# Altium PCB DB.PcbDoc (part 2 of 2)
Units mil, origin at the board's own origin, x right, y up, seen from the top; angles counter-clockwise.
Board outline 2968 x 1917 mil, 2 copper layers (Top Layer, Bottom Layer); 91 components, 77 nets, 333 pads, 79 vias.
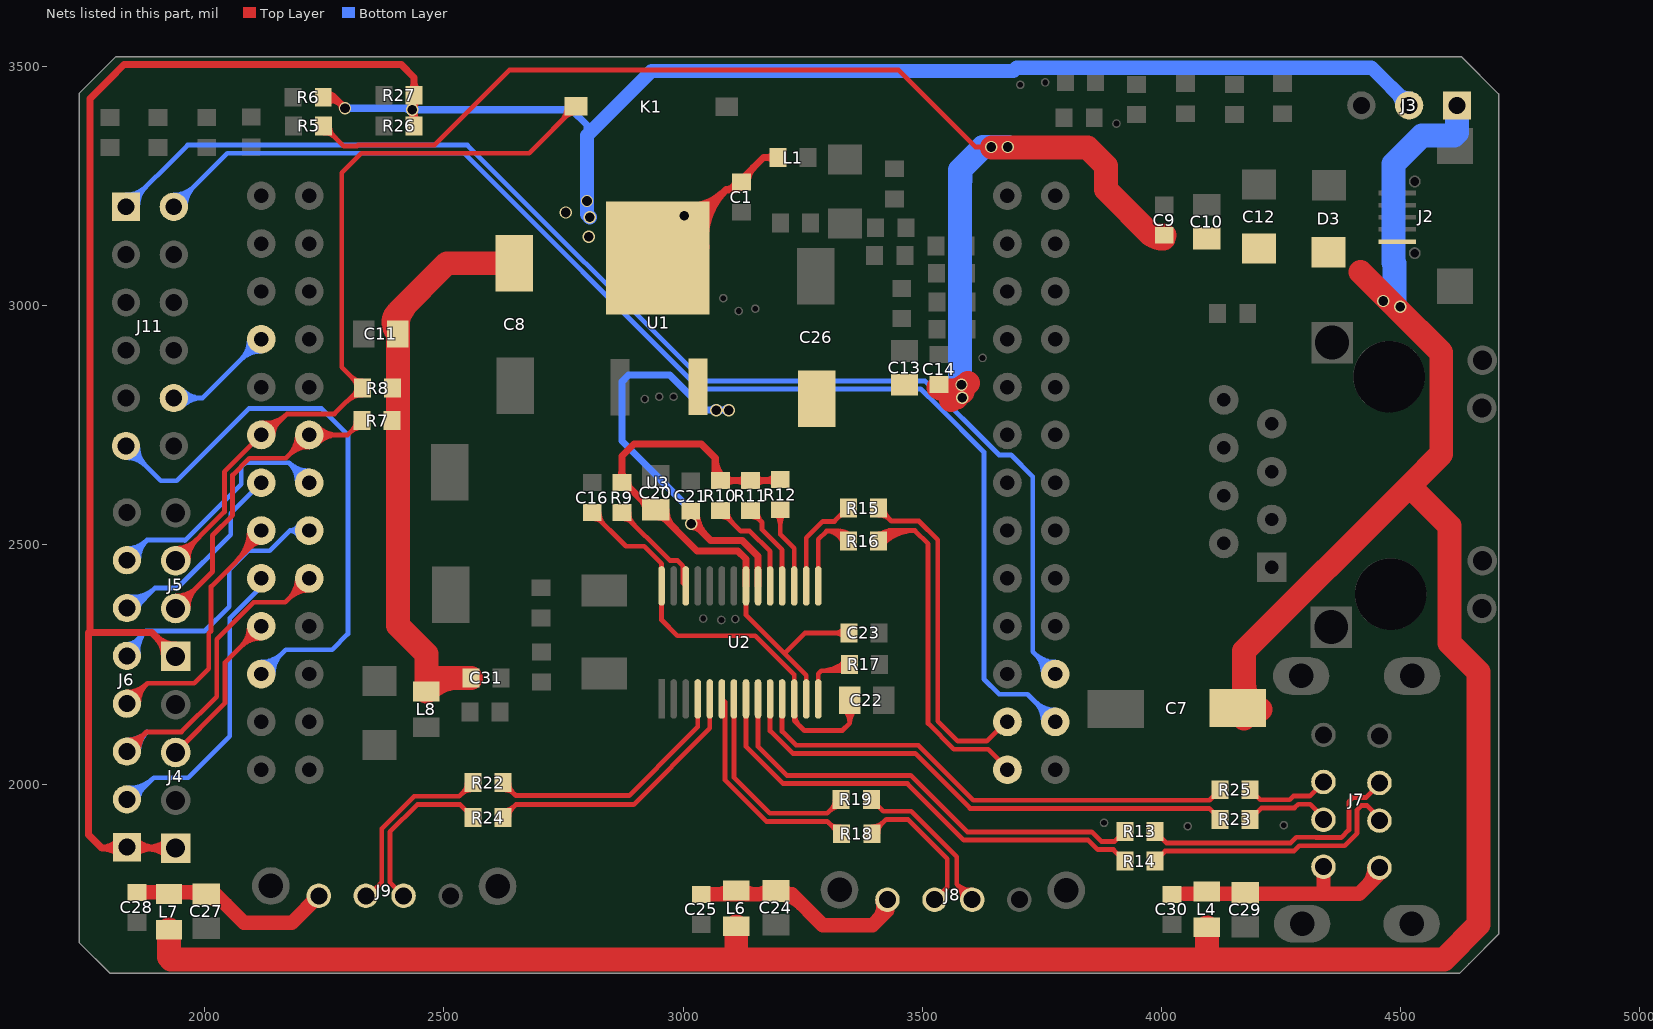
[diagram p2: the nets of this part, all layers, seen from the top]

## Via types
v1: diameter 26, hole 20, Top Layer to Bottom Layer, tented both sides, 72 vias
v2: diameter 50, hole 40, Top Layer to Bottom Layer, 4 vias
v3: diameter 157.48, hole 157.48, Top Layer to Bottom Layer, 3 vias

## Nets (pads, with @x,y where several pads share a name; then routed paths per layer and width w, separated by ;. In a path a pad name is that pad's centre, name@x,y a point inside that pad or via, vN(x,y) a via of type N, cw(c..) or ccw(c..) an arc to the next point about the centre after c; other vN are vias at no path point) (continued)
NetJ4_3: J4.3 U3.49 | length 489.8
  Top Layer w10: J4.3@1939,2066 2042,2169 2042,2254 U3.49@2118,2330 ; U3.49@2093,2330 cw(c2032.64,2330) 2075.32,2287.32 cw(c2118,2244.64) U3.49@2118,2305 ; U3.49@2103,2330 cw(c2066.79,2330) 2092.39,2304.39 cw(c2118,2278.79) U3.49@2118,2315
NetJ5_2: J5.2 R7.1 U3.32 | length 1156.9
  Top Layer w10: J5.2@1939,2367 2016,2444 2016,2519.96 2058,2561.96 2058,2645.96 2093.04,2681 2169,2681 U3.32@2218,2730 2298.5,2730 R7.1@2328.5,2760 ; J5.2@1939,2383 ccw(c1939,2421.63) 1966.31,2394.31 ccw(c1993.63,2367) J5.2@1955,2367 ; J5.2@1939,2393 ccw(c1939,2455.77) 1983.38,2411.38 ccw(c2027.77,2367) J5.2@1965,2367 ; U3.32@2193,2730 cw(c2132.64,2730) 2175.32,2687.32 cw(c2218,2644.64) U3.32@2218,2705 ; U3.32@2203,2730 cw(c2166.79,2730) 2192.39,2704.39 cw(c2218,2678.79) U3.32@2218,2715 ; U3.32@2228.61,2719.39 cw(c2254.21,2693.79) 2254.21,2730 cw(c2254.21,2766.21) U3.32@2228.61,2740.61 ; U3.32@2235.68,2712.32 cw(c2278.36,2669.64) 2278.36,2730 cw(c2278.36,2790.36) U3.32@2235.68,2747.68 ; 2303.44,2734.93 cw(c2328.5,2709.86) R7.1@2328.5,2745.31 ; 2308.19,2739.68 ccw(c2289.84,2758.03) R7.1@2315.79,2758.03
NetJ5_3: J5.3 K1.2 R8.2 U3.45 | length 2060.5
  Top Layer w10: J5.3@1939,2467 2041,2569 2041,2653 U3.45@2118,2730 2128,2730 2172,2774 ; J5.3@1939,2483 ccw(c1939,2521.63) 1966.31,2494.31 ccw(c1993.63,2467) J5.3@1955,2467 ; J5.3@1939,2493 ccw(c1939,2555.77) 1983.38,2511.38 ccw(c2027.77,2467) J5.3@1965,2467 ; U3.45@2119.22,2744.95 ccw(c2123.09,2792.35) 2156.72,2758.72 ; U3.45@2120.04,2754.92 ccw(c2125.4,2820.59) 2172,2774 ; U3.45@2143,2730 cw(c2179.21,2730) 2153.61,2755.61 ; 2296.75,2799.75 cw(c2329.5,2766.99) R8.2@2329.5,2813.31 ; 2304.44,2853.07 ccw(c2329.5,2878.14) R8.2@2329.5,2842.69 ; 2309.19,2848.32 cw(c2290.84,2829.97) R8.2@2316.79,2829.97 ; R8.2@2312.37,2815.37 ccw(c2301.71,2826.03) R8.2@2316.79,2826.03 ; R8.2@2313.82,2816.82 cw(c2329.5,2801.13) R8.2@2329.5,2823.32 ; 2744.21,3385.21 ccw(c2712.42,3417) K1.2@2757.38,3417 ; 2753.71,3394.72 cw(c2772.06,3376.37) K1.2@2772.06,3402.32 ; K1.2@2776,3417 2678,3319 2327,3319 2286,3278 2286,2871.5 R8.2@2329.5,2828 2325,2828 2271,2774 2172,2774
NetJ6_2: J6.2 U3.48 | length 756.1
  Bottom Layer w10: J6.2@1837,1968 1848,1968 1893,2013 ; J6.2@1837.93,1982.5 ccw(c1841.21,2033.52) 1877.37,1997.37 ; J6.2@1838.57,1992.48 ccw(c1843.1,2062.89) 1893,2013 ; J6.2@1861.53,1968 cw(c1894.19,1968) 1871.09,1991.09 ; U3.48@2118,2430 2118,2413 2052,2347 2052,2100 1965,2013 1893,2013
NetJ6_3: J6.3 U3.35 | length 1099.2
  Top Layer w10: J6.3@1837,2068 1878,2109 ; J6.3@1837.22,2082.53 ccw(c1837.72,2115.85) 1861.28,2092.28 ccw(c1884.85,2068.72) J6.3@1851.53,2068.22 ; J6.3@1837.37,2092.52 ccw(c1838.21,2148.78) 1878,2109 ; J6.3@1861.52,2068.37 cw(c1917.78,2069.21) 1878,2109 ; U3.35@2193,2430 cw(c2132.64,2430) 2175.32,2387.32 cw(c2218,2344.64) U3.35@2218,2405 ; U3.35@2203,2430 cw(c2166.79,2430) 2192.39,2404.39 cw(c2218,2378.79) U3.35@2218,2415 ; U3.35@2218,2430 2168,2380 2102,2380 2025,2303 2025,2183 1951,2109 1878,2109
  Bottom Layer w10: J6.3@1837,2068 1838,2068 1879,2109 cw(c1839.16,2148.83) J6.3@1837.66,2092.52 ; J6.3@1837.39,2082.52 ccw(c1838.31,2116.8) 1862.55,2092.55 ; J6.3@1851.53,2068 cw(c1884.19,2068) 1861.09,2091.09 ; J6.3@1861.53,2068 cw(c1918.33,2068) 1878.16,2108.16
NetJ6_4: J6.4 U3.47 | length 862.1
  Top Layer w10: J6.4@1837,2168 1880,2211 1978,2211 2008,2241 2008,2315.04 2013,2320.04 2013,2413 2118,2518 U3.47@2118,2530 ; J6.4@1837,2182.53 ccw(c1837,2217.6) 1861.8,2192.8 ccw(c1886.6,2168) J6.4@1851.53,2168 ; J6.4@1837,2192.53 ccw(c1837,2251.74) 1878.87,2209.87 ccw(c1920.74,2168) J6.4@1861.53,2168 ; 2066.84,2466.84 ccw(c2003.67,2530) U3.47@2093,2530 ; 2083.91,2483.91 ccw(c2037.82,2530) U3.47@2103,2530 ; 2095.81,2495.81 cw(c2118,2473.62) U3.47@2118,2505 ; 2100.98,2500.98 ccw(c2071.96,2530) U3.47@2113,2530
NetJ6_5: J6.5 U3.34 | length 702.4
  Bottom Layer w10: J6.5@1837,2268 1837,2280 1877,2320 ; J6.5@1837,2292.53 ccw(c1837,2322.77) 1858.39,2301.39 ; J6.5@1851.36,2270.23 cw(c1892.52,2276.61) 1863.06,2306.06 ; J6.5@1861.24,2271.76 cw(c1916.64,2280.35) 1877,2320 ; U3.34@2195.68,2518.75 ccw(c2177.4,2509.53) 2177.4,2530 ; U3.34@2195.68,2541.25 cw(c2177.4,2550.47) 2177.4,2530 ; U3.34@2218,2530 2177.4,2530 ; 1877,2320 2000,2320 2051,2371 2051,2448 2091,2488 2135.4,2488 2177.4,2530
NetJ6_6: J6.6 U3.46 | length 570.3
  Bottom Layer w10: J6.6@1837,2368 1854,2368 1896,2410 ; J6.6@1837.72,2372.47 ccw(c1843.38,2407.35) 1868.36,2382.36 ; J6.6@1839.32,2382.34 ccw(c1847.23,2431.13) 1882.18,2396.18 ; J6.6@1840.92,2392.21 ccw(c1851.08,2454.91) 1896,2410 ; J6.6@1861.53,2368 cw(c1879.7,2368) 1866.85,2380.85 ; U3.46@2118,2630 2054,2566 2054,2521.19 1942.81,2410 1896,2410
NetJ6_7: J6.7 U3.33 | length 801
  Bottom Layer w10: J6.7@1837,2468 1879,2510 1956.81,2510 1957.91,2508.91 2076,2627 2076,2663 2085,2672 2176,2672 ; J6.7@1837,2482.53 ccw(c1837,2517.6) 1861.8,2492.8 ccw(c1886.6,2468) J6.7@1851.53,2468 ; J6.7@1837,2492.53 ccw(c1837,2551.74) 1878.87,2509.87 ccw(c1920.74,2468) J6.7@1861.53,2468 ; U3.33@2193,2630.29 ccw(c2134.95,2630.95) 2176,2672 ; U3.33@2203,2630.17 ccw(c2168.17,2630.57) 2192.8,2655.2 ccw(c2217.43,2679.83) U3.33@2217.83,2645 ; U3.33@2217.71,2655 cw(c2217.05,2713.05) 2176,2672 ; U3.33@2218,2630 2176,2672
NetJ7_2: J7.2 R25.2 | length 177.8
  Top Layer w10: R25.2@4185.5,1988 4206.5,1967 4268,1967 4276,1975 4310,1975 4338.79,2003.79 J7.2@4338.79,2004.37
NetJ7_3: J7.3 R23.2 | length 182.6
  Top Layer w10: R23.2@4185.5,1926 4209.5,1950 4278,1950 4286,1958 4311,1958 4338.79,1930.21 J7.3@4338.79,1925.63
NetJ7_6: J7.6 R14.2 | length 562.3
  Top Layer w10: R14.2@3986.5,1839 4007.5,1860 4277.04,1860 4288.08,1871.04 4383.08,1871.04 4409,1896.96 4409,1946 4418,1955 4430,1955 4455.79,1929.21 J7.6@4455.79,1923.63
NetJ7_7: J7.7 R13.2 | length 574.8
  Top Layer w10: R13.2@3986.5,1901 4010.5,1877 4270,1877 4282,1889 4322.26,1889 4323.22,1888.04 4376.04,1888.04 4392,1904 4392,1963 4401,1972 4428,1972 4455.79,1999.79 J7.7@4455.79,2002.37 J7.7@4462.59,2002.37
NetJ8_2: J8.2 R18.2 | length 348.8
  Top Layer w10: R18.2@3394.5,1896 3424.5,1926 3470,1926 3552,1844 3552,1784.58 J8.2@3525.63,1758.21 ; R18.2@3394.5,1910.68 ccw(c3394.5,1946.14) 3419.56,1921.07 ; R18.2@3407.21,1897.97 cw(c3433.16,1897.97) 3414.81,1916.32
NetJ8_3: J8.3 R19.2 | length 400.1
  Top Layer w10: R19.2@3393.5,1968 3418.5,1943 3477.04,1943 3572,1848.04 3572,1790.58 ; J8.3@3583.82,1759.45 ccw(c3543.3,1761.88) 3572,1790.58 ; J8.3@3603.14,1778.77 cw(c3600.7,1819.28) 3572,1790.58 ; J8.3@3604.37,1758.21 3572,1790.58
NetJ9_2: J9.2 R22.2 | length 435.8
  Top Layer w10: J9.2@2336.63,1766.21 2341.21,1766.21 2370,1795 2370,1907.04 2437.45,1974.5 2532,1974.5 R22.2@2560.5,2003 ; 2535.44,1977.93 cw(c2560.5,1952.86) R22.2@2560.5,1988.32 ; 2540.19,1982.68 ccw(c2521.84,2001.03) R22.2@2547.79,2001.03
NetJ9_3: J9.3 R24.2 | length 353.8
  Top Layer w10: J9.3@2415.37,1766.21 2387,1794.58 2387,1900 2444,1957 2533.5,1957 R24.2@2560.5,1930
NetR9_1: R9.1 U2.26 | length 266.2
  Top Layer w10: R9.1@2872,2567.5 2971.95,2467.56 2988.02,2467.56 2999.09,2456.49 2999.09,2420.53 U2.26@3005.39,2414.22 ; R9.1@2873.97,2554.79 cw(c2873.97,2528.84) 2892.32,2547.19 ; R9.1@2886.69,2567.5 ccw(c2922.14,2567.5) 2897.07,2542.44
NetR10_1: R10.1 U2.19 | length 259.6
  Top Layer w10: R10.1@3078,2571.5 3120.5,2529 3139.43,2529 3181.77,2486.66 U2.19@3181.77,2414.22 ; R10.1@3079.97,2558.79 cw(c3079.97,2532.84) 3098.32,2551.19 ; R10.1@3092.69,2571.5 ccw(c3128.14,2571.5) 3103.07,2546.44
NetR11_1: R11.1 U2.18 | length 229.4
  Top Layer w10: R11.1@3141,2571.5 3165,2547.5 3165,2531.72 3206.97,2489.75 U2.18@3206.97,2414.22 ; R11.1@3142.97,2558.79 cw(c3142.97,2532.84) 3161.32,2551.19 ; R11.1@3155.66,2570.68 ccw(c3184.34,2568.81) 3164.01,2548.49
NetR12_1: R12.1 U2.17 | length 219.6
  Top Layer w10: R12.1@3194.01,2564.51 cw(c3172.3,2542.8) 3203,2542.8 cw(c3233.7,2542.8) R12.1@3211.99,2564.51 ; R12.1@3203,2573.5 3203,2522 3232.17,2492.83 U2.17@3232.17,2414.22
NetR15_1: R15.1 U2.16 | length 200.1
  Top Layer w10: U2.16@3257.36,2414.22 3257.36,2514.65 3291.72,2549 3316.23,2549 R15.1@3335.04,2567.81
NetR15_2: R15.2 U3.25 | length 759.9
  Top Layer w10: R15.2@3408.5,2562.31 cw(c3408.5,2526.86) 3433.56,2551.93 ; R15.2@3408.5,2577 3435.5,2550 3493,2550 3532.22,2510.78 3532.22,2360 3532.22,2131.78 3574,2090 3635,2090 3677,2132 U3.25@3677,2134 ; R15.2@3421.21,2575.03 ccw(c3447.16,2575.03) 3428.81,2556.68
NetR16_1: R16.1 U2.15 | length 326.8
  Top Layer w10: U2.15@3282.56,2414.22 3282.56,2511.56 3300,2529 ; 3314.33,2529 cw(c3314.33,2498.51) R16.1@3342.95,2509.03 ; 3328.67,2529 cw(c3328.67,2503.78) R16.1@3352.34,2512.48 ; R16.1@3332.79,2510.11 ccw(c3307.86,2510.39) 3325.49,2528.01 ccw(c3339.64,2542.16) R16.1@3343.22,2522.48 ; R16.1@3333.57,2505.58 ccw(c3300,2493.24) 3300,2529 ; R16.1@3345.5,2508 3324.5,2529 3300,2529
NetR16_2: R16.2 U3.26 | length 917.4
  Top Layer w10: R16.2@3403.21,2514.98 cw(c3438.16,2481.82) 3438.16,2530 ; R16.2@3408.5,2508 3430.5,2530 ; R16.2@3409.78,2522.62 ccw(c3412.36,2548.13) 3430.5,2530 ; R16.2@3410.47,2508.1 cw(c3461.44,2459.74) 3461.44,2530 ; R16.2@3417.72,2501.22 cw(c3484.71,2437.65) 3484.71,2530 ; R16.2@3421.21,2509.97 cw(c3447.16,2509.97) 3428.81,2528.32 ; U3.26@3677,2034 3638,2073 3566,2073 3512.22,2126.78 3512.22,2502.5 3484.72,2530 ; 3430.5,2530 3484.72,2530
NetR17_2: R17.2 U2.14 | length 189.1
  Top Layer w10: U2.14@3282.56,2178 3282.56,2230.56 3289,2237 3328,2237 ; 3290.17,2237 ccw(c3290.17,2305.36) R17.2@3338.51,2257.02 ; 3314.31,2237 ccw(c3314.31,2281.22) R17.2@3345.58,2249.95
PA_PE_G0: J11.2 U3.12 | length 2959.6
  Bottom Layer w10: J11.2@1935,3207 2047,3319 2541.96,3319 3034.96,2826 3497,2826 3532,2791 3629,2694 3629,2219.6 3660.6,2188 3720,2188 U3.12@3778,2130 ; J11.2@1935,3221.53 ccw(c1935,3256.6) 1959.8,3231.8 ccw(c1984.6,3207) J11.2@1949.53,3207 ; J11.2@1935,3231.53 ccw(c1935,3290.74) 1976.87,3248.87 ccw(c2018.74,3207) J11.2@1959.53,3207 ; U3.12@3753,2130 ccw(c3692.64,2130) 3735.32,2172.68 ccw(c3778,2215.36) U3.12@3778,2155 ; U3.12@3763,2130 ccw(c3726.79,2130) 3752.39,2155.61 ccw(c3778,2181.21) U3.12@3778,2145
PA_PE_G1: J11.1 U3.11 | length 2968.7
  Bottom Layer w10: J11.1@1835,3207 1964,3336 2549,3336 3042,2843 3505.6,2843 3660.6,2688 3686,2688 3731,2643 3731,2277 U3.11@3778,2230 ; J11.1@1835,3221.53 ccw(c1835,3256.6) 1859.8,3231.8 ccw(c1884.6,3207) J11.1@1849.53,3207 ; J11.1@1835,3231.53 ccw(c1835,3290.74) 1876.87,3248.87 ccw(c1918.74,3207) J11.1@1859.53,3207 ; U3.11@3753,2230 ccw(c3692.64,2230) 3735.32,2272.68 ccw(c3778,2315.36) U3.11@3778,2255 ; U3.11@3763,2230 ccw(c3726.79,2230) 3752.39,2255.61 ccw(c3778,2281.21) U3.11@3778,2245
USB_SLAVE1_D+: R25.1 U2.11 | length 1052.3
  Top Layer w10: U2.11@3206.97,2178 3206.97,2110.03 3236,2081 3492,2081 3607,1966 4100.5,1966 R25.1@4122.5,1988
USB_SLAVE1_D-: R23.1 U2.10 | length 1084.3
  Top Layer w10: U2.10@3181.77,2178 3181.77,2111.19 3228.96,2064 3484.96,2064 3599.96,1949 4099.5,1949 R23.1@4122.5,1926
USB_SLAVE2_D+: R13.1 U2.9 | length 957.4
  Top Layer w10: U2.9@3156.58,2178 3156.58,2078.42 3217,2018 3476,2018 3594,1900 3854.04,1900 3874.04,1880 3902.5,1880 R13.1@3923.5,1901
USB_SLAVE2_D-: R14.1 U2.8 | length 990.8
  Top Layer w10: U2.8@3131.38,2178 3131.38,2078.62 3209,2001 3468.96,2001 3586.96,1883 3839,1883 3847,1883 3867,1863 3899.5,1863 R14.1@3923.5,1839
USB_SLAVE3_D+: R19.1 U2.7 | length 479.7
  Top Layer w10: U2.7@3106.18,2178 3106.18,2013.82 3181,1939 3301.5,1939 R19.1@3330.5,1968 ; 3305.44,1942.93 cw(c3330.5,1917.86) R19.1@3330.5,1953.32 ; 3310.19,1947.68 ccw(c3291.84,1966.03) R19.1@3317.79,1966.03
USB_SLAVE3_D-: R18.1 U2.6 | length 501
  Top Layer w10: U2.6@3080.98,2178 3087.29,2171.69 3087.29,2008.67 3173.96,1922 3301,1922 3324,1899 R18.1@3331.5,1899 ; 3304.24,1918.76 ccw(c3324.97,1939.5) R18.1@3329.53,1910.53 ; R18.1@3314.37,1908.63 cw(c3303.71,1897.97) R18.1@3318.79,1897.97
USB_SLAVE4_D+: R24.1 U2.5 | length 619.3
  Top Layer w10: R24.1@2623.5,1930 2650.5,1957 2896.28,1957 3055.79,2116.5 U2.5@3055.79,2178 ; R24.1@2623.5,1944.68 ccw(c2623.5,1980.14) 2648.56,1955.07 ; R24.1@2636.21,1931.97 cw(c2662.16,1931.97) 2643.81,1950.32
USB_SLAVE4_D-: R22.1 U2.4 | length 600.6
  Top Layer w10: R22.1@2623.5,1988.32 cw(c2623.5,1952.86) 2648.56,1977.93 ; R22.1@2623.5,2003 2650.5,1976 2887,1976 3005.49,2094.49 ; R22.1@2636.21,2001.03 ccw(c2662.16,2001.03) 2643.81,1982.68 ; 2994,2083 3005.49,2094.49 ; U2.4@3030.59,2178 3030.59,2119.59 3005.49,2094.49
USB_VCC1: C29.2 C30.2 J7.4 J7.5 L4.2 | length 624.1
  Top Layer w30: 4048,1770.5 4175,1770.5 4413.5,1770.5 4455.79,1812.79 J7.5@4455.79,1825.2 ; 4062.58,1770.5 ccw(c4062.58,1800.93) L4.2@4084.1,1779.41 ; L4.2@4105.9,1779.41 ccw(c4127.42,1800.93) 4127.42,1770.5 ; 4145.98,1770.5 ccw(c4145.98,1795.55) C29.2@4163.69,1777.83 ; C29.2@4186.31,1777.83 ccw(c4204.02,1795.55) 4204.02,1770.5 ; 4337,1772.37 4338.79,1774.16 J7.4@4338.79,1827.2 ; 4428.93,1785.93 ccw(c4389.65,1825.2) J7.5@4445.2,1825.2
USB_VCC2: 
USB_VCC3: C24.2 C25.2 J8.1 L6.2 | length 708.1
  Top Layer w30: C25.2@3038,1769.5 3227.5,1769.5 ; 3071.34,1769.5 ccw(c3071.34,1810.17) L6.2@3100.1,1781.41 ; L6.2@3121.9,1781.41 ccw(c3150.66,1810.17) 3150.66,1769.5 ; 3152.91,1769.5 ccw(c3152.91,1811.62) C24.2@3182.69,1781.83 ; C24.2@3199.91,1768.8 cw(c3199.91,1700.47) 3248.22,1748.78 ; C24.2@3201.8,1769.03 cw(c3211.16,1732.49) 3237.83,1759.17 ; C24.2@3206.21,1780.74 ccw(c3227.5,1795.27) 3227.5,1769.5 ; 3407,1716 ccw(c3378.92,1744.09) J8.1@3417.04,1755.24 ; J8.1@3427.2,1758.21 3427.2,1736.2 3396,1705 3292,1705 3227.5,1769.5
USB_VCC4: C27.2 C28.2 J9.1 L7.2 | length 533.6
  Top Layer w30: C28.2@1858,1773.5 2003,1773.5 2018.5,1773.5 2082,1710 2181.99,1710 J9.1@2238.2,1766.21 ; 1896.95,1773.5 cw(c1896.95,1749.24) L7.2@1914.1,1766.39 ; L7.2@1935.9,1766.39 cw(c1953.05,1749.24) 1953.05,1773.5 ; 1968.85,1773.5 cw(c1968.85,1741.18) C27.2@1991.69,1764.03 ; C27.2@2008.91,1761.8 cw(c2008.91,1710.37) 2045.27,1746.73
VCC3V3: C1.1 C8.1 C11.2 C31.1 J3.2 J4.1 J5.1 J6.1 L1.1 L8.1 R6.1 R7.2 R8.1 R26.1 R27.1 U1.3 | length 8708.9
  Top Layer w15: 1757,2317 1757,1894 1785,1866 ; 1788.65,1866 cw(c1788.65,1819.65) J6.1@1821.42,1852.42 ; 1806,3479 1800,3473 ; J6.1@1820.22,1882.28 cw(c1785,1912.25) 1785,1866 ; J6.1@1852.58,1852.42 cw(c1885.35,1819.65) 1885.35,1866 ; J6.1@1852.58,1883.58 ccw(c1895.01,1926.01) 1895.01,1866 ; J5.1@1915.5,2267 ccw(c1858.77,2267) 1898.88,2307.12 ccw(c1939,2347.23) J5.1@1939,2290.5 ; J4.1@1922.38,1849.38 ccw(c1882.27,1809.27) 1882.27,1866 ccw(c1882.27,1922.73) J4.1@1922.38,1882.62 ; J4.1@1939,1866 1785,1866 ; J5.1@1939,2267 1889,2317 1760,2317 1760,3433 1800,3473 ; R6.1@2244.64,3437.87 cw(c2256.24,3422.3) 2269.97,3436.03 ; R6.1@2247.39,3438.81 cw(c2248.42,3393.55) 2280.43,3425.57 ; R6.1@2247.5,3436 2270,3436 ; R6.1@2253.6,3425.84 cw(c2266.72,3408.25) 2282.24,3423.76 ; R6.1@2255.19,3429.28 cw(c2270,3416.33) 2270,3436 ; R6.1@2255.19,3442.72 ccw(c2270,3455.67) 2270,3436 ; v1@2287.5,3413 ccw(c2274.22,3413) 2283.61,3422.39 ccw(c2293,3431.78) v1@2293,3418.5 ; v1(2293,3413) 2270,3436 ; v1@2430.11,3406.11 cw(c2412.28,3388.28) R26.1@2437.5,3388.28 ; v1@2430.11,3413.89 ccw(c2412.28,3431.72) R27.1@2437.5,3431.72 ; R26.1@2430.27,3385.19 ccw(c2412.83,3402.63) 2437.5,3402.63 ccw(c2462.16,3402.63) R26.1@2444.72,3385.19 ; R27.1@2430.27,3430.81 cw(c2412.83,3413.37) 2437.5,3413.37 cw(c2462.16,3413.37) R27.1@2444.72,3430.81 ; R27.1@2430.27,3449.19 ccw(c2412.83,3466.63) 2437.5,3466.63 ccw(c2462.16,3466.63) R27.1@2444.72,3449.19 ; R26.1@2437.5,3376 R27.1@2437.5,3440 2437.5,3477.5 2410.81,3504.19 1831.19,3504.19 1800,3473 ; U1.3@2947,3100 3089.5,3242.5 ; U1.3@2959.5,3164.19 ccw(c2976.95,3240.1) U1.3@3032.03,3185.03 ; U1.3@2962.86,3178.81 ccw(c2984.11,3271.25) U1.3@3051.18,3204.18 ; U1.3@2966.22,3193.43 ccw(c2991.27,3302.4) 3070.34,3223.34 ; U1.3@2969.58,3208.05 ccw(c2998.43,3333.55) 3089.49,3242.49 ; U1.3@3017.31,3117.84 cw(c3115.04,3128.94) U1.3@3045.49,3198.49 ; U1.3@3032.22,3119.53 cw(c3154.55,3133.43) 3067.49,3220.49 ; U1.3@3047.12,3121.22 cw(c3194.05,3137.93) 3089.49,3242.49 ; C1.1@3106.97,3242.5 ccw(c3106.97,3260.5) C1.1@3124.76,3257.77 ; C1.1@3109.93,3260.04 cw(c3089.5,3263.17) 3089.5,3242.5 ; C1.1@3134.18,3258.5 cw(c3176.89,3258.5) 3146.69,3288.69 ; L1.1@3191.28,3302.78 ccw(c3173.84,3285.34) 3173.84,3310 ccw(c3173.84,3334.66) L1.1@3191.28,3317.22 ; L1.1@3198.5,3310 3168,3310 3122,3264 C1.1@3122,3258.5 3106,3242.5 3089.5,3242.5
  Top Layer w50: C11.2@2401.07,2946.91 cw(c2490.8,2946.91) 2427.35,3010.35 ; C11.2@2401.62,2945.39 cw(c2424.94,2964.92) 2403.43,2986.43 ; L8.1@2466.83,2196.46 cw(c2528.48,2134.81) 2528.48,2222 ; C31.1@2556.5,2222 2491.6,2222 L8.1@2463,2193.4 2463,2272 2403.43,2331.57 2403.43,2828 C11.2@2403.43,2941 2403.43,2986.43 ; C8.1@2647,3089 2506,3089 2403.43,2986.43
  Bottom Layer w15: v1(2293,3413) v1@2431,3413 ; v1@2296.89,3409.11 cw(c2306.28,3399.72) 2306.28,3413 cw(c2306.28,3426.28) v1@2296.89,3416.89 ; 2413.48,3413 cw(c2413.48,3389.48) v1@2430.11,3406.11 ; v1(2434,3410) 2767,3410 2799,3378 2799,3356 ; v1@2437.89,3406.11 cw(c2447.28,3396.72) 2447.28,3410 cw(c2447.28,3423.28) v1@2437.89,3413.89
  Bottom Layer w30: v1(2805,3185) 2799,3191 2799,3356 2934,3491 3690.16,3491 3697.16,3498 4439,3498 J3.2@4518,3419 ; J3.2@4503.47,3419 ccw(c4468.4,3419) 4493.2,3443.8 ccw(c4518,3468.6) J3.2@4518,3433.53
  other v1: 2803,3144 3002,3188 2755,3195 2799,3219
VCC5V: C7.1 C9.2 C10.2 C12.1 C13.2 C14.2 C21.2 C26.1 D3.2 J2.5 J3.1 L4.1 L6.1 L7.1 R5.1 U1.1 U2.20 | length 9804
  Top Layer w10: R5.1@2248.5,3361.31 cw(c2248.5,3325.86) 2273.56,3350.93 ; R5.1@2248.5,3376 2290.5,3334 2317.96,3334 2319.96,3336 2480,3336 2554,3410 ; R5.1@2261.21,3374.03 ccw(c2287.16,3374.03) 2268.81,3355.68 ; 2491,3347 2554,3410 ; U2.20@3156.58,2414.22 U2.20@3156.58,2453.57 ; v1@3638.34,3326.34 ccw(c3624.69,3312.69) 3624.69,3332 ccw(c3624.69,3351.31) v1@3638.34,3337.66 ; v1(3644,3332) 3611,3332 3450,3493 2637,3493 2554,3410
  Top Layer w15: C21.2@3010.18,2562.1 cw(c3002.49,2551) v1@3016,2551 ; C21.2@3010.83,2563.2 cw(c2998.8,2550.9) 3016,2550.9 cw(c3027.64,2550.9) C21.2@3022.49,2561.34 ; C21.2@3013.2,2570.83 ccw(c3048.29,2568.45) v1@3023.42,2543.58 ; C21.2@3016,2559.69 ccw(c3032.69,2559.69) v1@3020.89,2547.89 ; C21.2@3016,2570.5 v1@3016,2551 ; v1@3017,2538.5 cw(c3017,2510.74) 3036.63,2530.37 ; C21.2@3021.82,2562.1 ccw(c3029.51,2551) v1@3016,2551 ; C21.2@3028.16,2569.81 ccw(c3092.02,2565.49) 3046.76,2520.24 ; U2.20@3156.58,2414.22 3156.58,2476.42 3123.5,2509.5 3057.5,2509.5 v1@3016,2551
  Top Layer w50: L7.1@1925,1695.6 1925,1638 1929.37,1633.63 3111,1633.63 ; L6.1@3111,1702.6 3111,1633.63 ; C26.1@3279,2806 C26.1@3282,2803 ; C14.2@3533.63,2829.03 ccw(c3558.05,2876.32) 3595.68,2838.68 3560,2803 ; v1@3572,2808 cw(c3588.9,2808) 3576.95,2819.95 ; 3572.05,2815.05 cw(c3584,2803.1) v1@3584,2820 ; v1@3646,3331 3845,3331 3884,3292 3884,3243 3979.5,3147.5 C9.2@4006,3147.5 ; 3974.58,3152.42 ccw(c4004.03,3181.87) C9.2@4004.03,3140.22 ; 4095,1655.13 L4.1@4095,1700.6 ; C7.1@4162,2156 C7.1@4173,2156 ; C7.1@4173,2137 C7.1@4173,2156 ; 4173,2209.83 ccw(c4230.52,2209.83) C7.1@4189.85,2169.16 ; C7.1@4207,2156 C7.1@4173,2156 ; 4416,3071 4486.24,3000.76 4585,2902 4585,2689.87 4518.57,2623.43 ; 3111,1633.63 4590.63,1633.63 4663,1706 4663,2234 4602,2295 4602,2540 4518.57,2623.43 ; C7.1@4173,2156 4173,2277.87 4518.57,2623.43
  Bottom Layer w15: v1(3017,2544) 3017,2572 2872,2717 2872,2841 2886,2855 2972,2855 3045,2782 v1(3095,2782) ; v1@3065.11,2778.11 ccw(c3055.72,2768.72) 3055.72,2782 ccw(c3055.72,2795.28) v1@3065.11,2785.89 ; v1@3072.89,2778.11 cw(c3082.28,2768.72) 3082.28,2782 cw(c3082.28,2795.28) v1@3072.89,2785.89 ; v1@3091.11,2778.11 ccw(c3081.72,2768.72) 3081.72,2782 ccw(c3081.72,2795.28) v1@3091.11,2785.89
  Bottom Layer w50: 3578.5,2822.43 3578.5,3283.5 3580,3285 ; 3580,3262 3580,3285 ; v1(3679,3332) v1(3644,3332) 3627,3332 3580,3285 ; v1@4487,3001 4487,3010 4487,3087.99 4485.1,3089.89 4485.1,3296.1 4545,3356 4612,3356 4618,3362 J3.1@4618,3419
  other v1: 3069,2782 3584,2808 3582,2835 4499,2998 4464,3010
VDD18_O: C16.2 C22.1 U2.12 U2.28 | length 1042.6
  Top Layer w10: C16.2@2810,2567.5 2880.5,2497 2918.46,2497 2955,2460.46 U2.28@2955,2414.22 2955,2343 2988,2310 3150.96,2310 3232.17,2228.79 U2.12@3232.17,2178 3232.17,2132.83 3253,2112 3333,2112 3348.57,2127.57 ; C16.2@2811.97,2554.79 cw(c2811.97,2528.84) 2830.32,2547.19 ; C16.2@2824.69,2567.5 ccw(c2860.14,2567.5) 2835.07,2542.44 ; U2.12@3234.06,2143.55 ccw(c3264.49,2143.55) 3242.97,2122.03 ; C22.1@3336.32,2156.4 cw(c3308.5,2127.57) 3348.57,2127.57 ; C22.1@3348.57,2175 3348.57,2127.57 ; C22.1@3360.81,2156.4 ccw(c3388.63,2127.57) 3348.57,2127.57
VDD33_O: C20.2 C23.1 R9.2 R10.2 R11.2 R12.2 U2.13 U2.21 | length 1706.8
  Top Layer w10: U2.21@3131.38,2414.22 3131.38,2353.62 3257.36,2227.64 U2.13@3257.36,2178 ; 3216,2277 3255,2316 C23.1@3346.5,2316 ; C23.1@3337.51,2307.01 ccw(c3315.8,2285.3) 3315.8,2316 ccw(c3315.8,2346.7) C23.1@3337.51,2324.99
  Top Layer w15: R9.2@2864.78,2637.72 ccw(c2847.34,2655.16) 2872,2655.16 ccw(c2896.66,2655.16) R9.2@2879.22,2637.72 ; R9.2@2873.97,2620.28 cw(c2873.97,2588.89) 2896.17,2611.08 ; R9.2@2884.18,2630.5 ccw(c2902.12,2630.5) R9.2@2889.44,2617.81 ; 2905.43,2601.82 ccw(c2937.09,2633.48) C20.2@2937.09,2588.7 ; 2913.66,2593.59 cw(c2893.64,2573.57) C20.2@2921.96,2573.57 ; C20.2@2948.91,2558.43 cw(c2948.91,2536.14) C20.2@2964.67,2551.9 ; C20.2@2964.04,2573.57 ccw(c3014.85,2573.57) 2978.92,2537.64 ; 3067,2680.96 ccw(c3122.5,2680.96) R10.2@3083.26,2641.72 ; R10.2@3087.19,2627.27 cw(c3104.63,2609.83) 3104.63,2634.5 cw(c3104.63,2659.16) R10.2@3087.19,2641.72 ; U2.21@3131.38,2414.22 3131.38,2470.51 3114.39,2487.5 3029.07,2487.5 C20.2@2943,2573.57 2933.69,2573.57 2876.76,2630.5 R9.2@2872,2630.5 2872,2686 2897,2711 3038,2711 3067,2682 3067,2645.5 R10.2@3078,2634.5 R11.2@3141,2634.5 3201,2634.5 R12.2@3203,2636.5 ; R11.2@3131.81,2627.27 ccw(c3114.37,2609.83) 3114.37,2634.5 ccw(c3114.37,2659.16) R11.2@3131.81,2641.72 ; R11.2@3150.19,2627.27 cw(c3167.63,2609.83) 3167.63,2634.5 cw(c3167.63,2659.16) R11.2@3150.19,2641.72 ; 3171.54,2634.5 ccw(c3171.54,2665.99) R12.2@3193.81,2643.72 ; 3181.2,2634.5 cw(c3181.2,2616.66) R12.2@3193.81,2629.27
WDT_RST_N: J11.10 U3.43 | length 533.7
  Bottom Layer w10: J11.10@1935,2807 1995,2807 U3.43@2118,2930 ; J11.10@1945.27,2796.73 cw(c1970.07,2771.93) 1970.07,2807 cw(c1970.07,2842.07) J11.10@1945.27,2817.27 ; J11.10@1952.34,2789.66 cw(c1994.21,2747.79) 1994.21,2807 cw(c1994.21,2866.21) J11.10@1952.34,2824.34 ; U3.43@2093,2930 cw(c2032.64,2930) 2075.32,2887.32 cw(c2118,2844.64) U3.43@2118,2905 ; U3.43@2103,2930 cw(c2066.79,2930) 2092.39,2904.39 cw(c2118,2878.79) U3.43@2118,2915
WLED_N: J11.11 U3.50 | length 1511.2
  Bottom Layer w10: J11.11@1835,2682.47 cw(c1835,2623.26) 1876.87,2665.13 cw(c1918.74,2707) J11.11@1859.53,2707 ; J11.11@1835,2692.47 cw(c1835,2657.4) 1859.8,2682.2 cw(c1884.6,2707) J11.11@1849.53,2707 ; J11.11@1835,2707 1908,2634 1941,2634 2092,2785 2244,2785 2299,2730 2299,2314 2266,2281 2169,2281 U3.50@2118,2230 ; U3.50@2118,2245 ccw(c2118,2281.21) 2143.61,2255.61 ccw(c2169.21,2230) U3.50@2133,2230 ; U3.50@2118,2255 ccw(c2118,2315.36) 2160.68,2272.68 ccw(c2203.36,2230) U3.50@2143,2230
pads on no net: J1.0 J1.7 J1.9 J1.10 J1.11 J1.12 J2.2 J2.3 J2.4 J2.MH1 J2.MH2 U2.25 U2.27 U3.1 U3.2 U3.5 U3.6 U3.7 U3.8 U3.9 U3.10 U3.14 U3.15 U3.18 U3.19 U3.20 U3.21 U3.22 U3.23
copper on no net: | length 144.6
  Top Layer w10: 4489,3160 4535,3160 4548,3160 v1(4557,3151) ; 4489,3185 4552,3185 v1(4559,3192)
  other v3: 2764.61,1773.11 3494,2681 2412,3210

## Polygon pours and split planes (outlines as drawn)
GND on Top Layer "Bottom Layer-No Net" (solid, pour order 1002): 1774.58,1849.74 1777.58,1852.74 1960.58,1852.74 1960.58,1960.74 1962.58,1962.74 2076.58,2076.74 2173.58,2076.74 2599.58,2076.74 2654.58,2131.74 2654.58,2701.74 2674.58,2721.74 2712.58,2759.74 3742.58,2759.74 4006.58,2759.74 4132.58,2885.74 4294.58,3047.74 4294.58,3490.74 1801.58,3490.74 1752.58,3441.74 1757.58,3436.74 1757.58,1866.74 1774.58,1849.74
GND on Top Layer "Bottom Layer-No Net" (solid, pour order 1001): 1749.5,1812.5 1749.5,1673.5 1745.5,1669.5 1802.5,1612.5 1830.5,1612.5 4573.5,1612.5 4697.5,1736.5 4697.5,3448.5 4673.5,3472.5 4637.5,3508.5 4531.5,3508.5 4430.5,3508.5 4380.5,3458.5 4355.5,3433.5 4355.5,2944.5 4355.5,2436.5 4260.5,2341.5 3993.5,2341.5 3987.5,2335.5 3677.5,2335.5 3625.5,2387.5 3588.5,2424.5 3588.5,2559.5 3416.5,2731.5 2789.5,2731.5 2672.5,2614.5 2672.5,2353.5 2672.5,2122.5 2607.5,2057.5 2090.5,2057.5 1965.5,1932.5 1965.5,1820.5 1967.5,1818.5 1761.5,1818.5 1747.5,1804.5
GND1 on Top Layer "Bottom Layer-No Net" (solid, pour order 1000): 3280.5,3311.5 3244.5,3275.5 3244.5,3121.5 3244.5,3109.5 3392.5,2961.5 3420.5,2933.5 3547,2933.5 3561.5,2933.5 3608.5,2886.5 3629.5,2865.5 3629.5,2745.5 3828.5,2745.5 3837.5,2736.5 3926.5,2647.5 3926.5,2488.5 3926.5,2425.5 3983.5,2368.5 3997.5,2354.5 4230.5,2354.5 4331.5,2455.5 4331.5,2536.5 4331.5,2996.5 4317.5,3010.5 4287.5,3040.5 4048.5,3040.5 3777.5,3311.5 3293.5,3311.5
GND1 on Bottom Layer "Bottom Layer-No Net" (solid, pour order 1005): 3276,3311.88 3240,3275.88 3240,3121.88 3240,3109.88 3388,2961.88 3416,2933.88 3542.5,2933.88 3557,2933.88 3604,2886.88 3625,2865.88 3625,2745.88 3824,2745.88 3833,2736.88 3922,2647.88 3922,2488.88 3922,2425.88 3979,2368.88 3993,2354.88 4226,2354.88 4327,2455.88 4327,2536.88 4327,2996.88 4313,3010.88 4283,3040.88 4044,3040.88 3773,3311.88 3289,3311.88
GND on Bottom Layer "Bottom Layer-No Net" (solid, pour order 1004): 1773.11,1859.31 1776.11,1862.31 1959.11,1862.31 1959.11,1970.31 1961.11,1972.31 2075.11,2086.31 2172.11,2086.31 2598.11,2086.31 2653.11,2141.31 2653.11,2711.31 2673.11,2731.31 2711.11,2769.31 3741.11,2769.31 4005.11,2769.31 4131.11,2895.31 4293.11,3057.31 4293.11,3500.31 1800.11,3500.31 1751.11,3451.31 1756.11,3446.31 1756.11,1876.31 1773.11,1859.31
GND on Bottom Layer "Bottom Layer-No Net" (solid, pour order 1003): 1753.5,1815.5 1753.5,1676.5 1749.5,1672.5 1806.5,1615.5 1834.5,1615.5 4577.5,1615.5 4701.5,1739.5 4701.5,3451.5 4677.5,3475.5 4641.5,3511.5 4535.5,3511.5 4434.5,3511.5 4384.5,3461.5 4359.5,3436.5 4359.5,2947.5 4359.5,2439.5 4264.5,2344.5 3997.5,2344.5 3991.5,2338.5 3681.5,2338.5 3629.5,2390.5 3592.5,2427.5 3592.5,2562.5 3420.5,2734.5 2793.5,2734.5 2676.5,2617.5 2676.5,2356.5 2676.5,2125.5 2611.5,2060.5 2094.5,2060.5 1969.5,1935.5 1969.5,1823.5 1971.5,1821.5 1765.5,1821.5 1751.5,1807.5

## Keep-outs
Keep-Out Layer:
  lines w5: 1736,1670 1736,3442 1814,3520 4627,3520 4705,3442 4705,1684 4627,1606 4625,1604 1802,1604 1737,1669

## Other copper
Top Layer:
  rectangle net GND: 3389,2878 3551,2917
  rectangle net GND: 4159,3230 4494,3360
  rectangle net VCC5V: 3289,2780 3594,2864
  rectangle net VCC5V: 4180,3062 4493,3142
  rectangle net VCC5V: 3983,3055 4417,3161
  rectangle net VCC5V: 3013,2751 3303,2882
  rectangle net GND: 2556,2759 2878,2913
  rectangle net VCC3V3: 2579,2976 3042,3235
  rectangle net VCC5V: 2879,1608 2996,1702
Bottom Layer:
  rectangle: 4553,3179 4598,3227
  rectangle: 4555,3121 4599,3163

## Silkscreen, mask and mechanical layers (free items; w line width, h text height)
Top Overlay:
  lines w5: 3370.68,3083.79 3370.68,3182.68 3384,3196 ; 3371,3083 3378.68,3075.32 3415,3075.32 ; 3386,3196.32 3408,3196.32 ; 3409.76,3196.6 3469,3196 ; 3417,3074 3427.32,3063.68 3427.32,2952 ; 3427,2951 3433.32,2944.68 3484.21,2944.68 ; 3470.79,3194.32 3492.68,3172.42 3492.68,2951.68 3486,2945 ; 3471.37,3197.26 3471.68,3310 ; 3471.77,3311.89 3494,3334 ; 3472,3353 3485.68,3366.68 ; 3489,3182 3542.21,3183.68 ; 3494.47,3335 3547,3335 ; 3502,2919.68 3502,3159 ; 3502,3161 3613,3161 ; 3504.21,2921.32 3621.21,2921.32 ; 3538.32,3168 3538.32,3177.21 ; 3539,3168 3546.68,3175.68 3619.21,3175.68 ; 3539.79,3168.32 3549,3168.32 ; 3547.32,3176.21 3548,3365 ; 3548.79,3365.32 3608.67,3365.32 ; 3616.68,2920.79 3616.68,3160.79 ; 3618.9,3370.2 3619,3177
  text "3.3V" at 4445,3482 h30
  text "G" at 4397,3480 h30
  text "5V" at 4579,3480 h30
  text "21" at 1774,3195 h30 r90
  text "20" at 2031,3180 h30 r90
  text "44" at 2030,3089 h30 r90
  text "43" at 1774,3080 h30 r90
  text "41" at 2029,2987 h30 r90
  text "42" at 1774,2980 h30 r90
  text "18" at 1776,2886 h30 r90
  text "40" at 2029,2881 h30 r90
  text "0" at 1775,2793 h30 r90
  text "17" at 2030,2781 h30 r90
  text "19" at 2026,2687 h30 r90
  text "72" at 1776,2680 h30 r90
  text "G" at 2041,2566 h30 r90
  text "G" at 1775,2559 h30 r90
  text "DAT" at 2042,2449 h30 r90
  text "CLK" at 1776,2439 h30 r90
  text "CS" at 1774,2347 h30 r90
  text "SCK" at 2041,2332 h30 r90
  text "WP" at 1776,2257 h30 r90
  text "3.3V" at 2043,2209 h30 r90
  text "G" at 2048,2150 h40 r90
  text "HOLD" at 1778,2107 h30 r90
  text "R" at 2050,2058 h40 r90
  text "SO" at 1775,2033 h30 r90
  text "T" at 2052,1962 h40 r90
  text "SI" at 1777,1940 h30 r90
  text "3.3V" at 2045,1826 h30 r90
  text "3.3V" at 1776,1808 h30 r90
Bottom Overlay:
  lines w5: 1742.21,3267 1743,2653 ; 1742.5,3270.31 2044,3269.93 ; 1744.5,2650.31 2046,2649.93 ; 1746,2605 1747.09,1765.25 ; 1745.99,2606.54 1877.3,2607.06 ; 1747.81,1764 1799,1764 ; 1748.1,3279 1748.31,3445.5 ; 1749,3444 1820.31,3515.13 2165.5,3514.69 ; 1749.5,3277.31 2167.99,3276.78 ; 1809,1774 1809,1818 ; 1813,1822 1822.77,1831.84 1877.3,1832.06 ; 1836.1,1800.74 1846.1,1810.74 1846.1,1757.55 ; 1847.26,1810.1 1857.26,1800.1 ; 1876,2606 1877,1833 ; 1897,1824.81 1897,2203.32 ; 1897.29,1823.74 2121.76,1824.61 2141,1844 2141,1876 2124,1893 2070.81,1893 ; 1898,2229.49 1898,2608 ; 1899,2608.68 2052,2609.28 ; 1899.29,2204.74 2056.99,2205.35 ; 1899.29,2226.74 2052,2227.33 ; 2045,3271 2046,2655 ; 2052,2228 2052,2609 ; 2060,2205.35 2060,1905 2071,1894 ; 2060,2278 2070,2268 ; 2060,2280 2070,2290 ; 2060.16,2572.16 2070.16,2562.16 ; 2060.29,2573.29 2070.29,2583.29 ; 2061,2278 2250,2278.33 ; 2061.83,2573.83 2279.1,2574.08 ; 2066.5,2971.31 2056.5,2981.31 ; 2066.5,2991.31 2056.5,2981.31 ; 2078.74,1918.9 2088.74,1908.9 ; 2079.1,1921.74 2089.1,1931.74 ; 2079.81,1919 2133,1919 ; 2167.69,3277.5 2167.99,3514.01 ; 2194.31,3375.5 2204.31,3385.5 ; 2194.5,3374.69 2204.5,3364.69 ; 2194.5,3375.31 2239,3376 ; 2297,2981 2056.5,2981.31
  text "LED0" at 1932,3501 h60 r90
  text "3.3V" at 2036,3495 h60 r90
  text "LED1" at 1838,3492 h60 r90
  text "5V" at 2144,3439 h60 r90
  text "LED" at 2417,3348 h60
  text "WRTnode_SSV4.1" at 3352,3309 h60
  text "20" at 2021,3243 h40 r90
  text "21" at 1793,3232 h40 r90
  text "44" at 2021,3150 h40 r90
  text "43" at 1794,3141 h40 r90
  text "42" at 1796.19,3045.19 h40 r90
  text "41" at 2019,3041 h40 r90
  text "GPIO" at 2526,3027 h60
  text "40" at 2020,2949 h40 r90
  text "_NUM" at 2530,2948 h60
  text "18" at 1792,2936 h40 r90
  text "17" at 2020,2843 h40 r90
  text "0" at 1796.49,2817.32 h40 r90
  text "19" at 2021,2739 h40 r90
  text "72" at 1796,2735 h40 r90
  text "G" at 2025.71,2587.68 h40 r90
  text "G" at 1796.03,2583.61 h40 r90
  text "I2C" at 2441,2541 h60
  text "DAT" at 2034,2526 h40 r90
  text "SCK" at 1796.11,2521.12 h40 r90
  text "SCK" at 2031.46,2409.83 h40 r90
  text "CS" at 1796.28,2392.81 h40 r90
  text "WP" at 1796.4,2298.5 h40 r90
  text "V" at 2037,2278 h40 r90
  text "3.3V" at 2401,2257 h40
  text "HOLD" at 1796.5,2220.86 h30 r90
  text "G" at 2025,2183 h40 r90
  text "SO" at 1796.67,2089.96 h40 r90
  text "R" at 2026,2087 h40 r90
  text "SI" at 1796.79,1991.97 h40 r90
  text "T" at 2023,1985 h40 r90
  text "3.3V" at 1796.9,1913.21 h40 r90
  text "UART" at 2367,1891 h60
  text "3.3V" at 2130,1839 h40
  text "SPI" at 1889,1690 h60
Top Solder:
  rectangle: 2881,1609 2996,1703
  rectangle: 2880,1822 2995,1916
Bottom Solder:
  rectangle: 4553,3179 4598,3227
  rectangle: 4555,3121 4599,3163

## Text inside footprints (layer, text, board x,y; h text height)
C7: Top Overlay "+" at 4191,2044 h45 r180
C8: Top Overlay "+" at 2762,3120 h45 r270
C26: Top Overlay "+" at 3164,2775 h45 r90
C35: Top Overlay "+" at 2399,2365 h45 r90